# EAGLE board main (EAGLE 9.6.2)
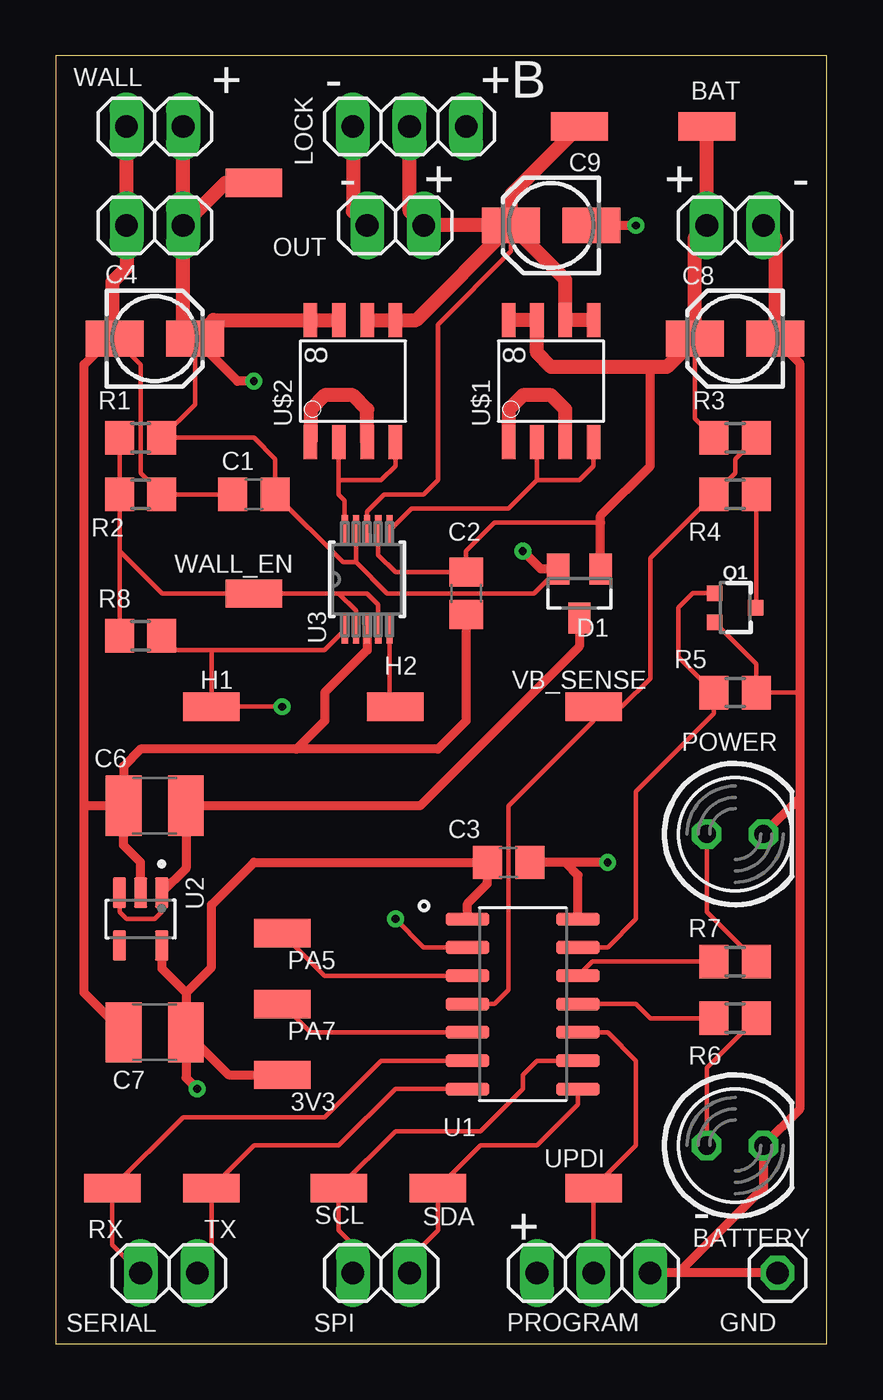
[diagram p0: board, top side]
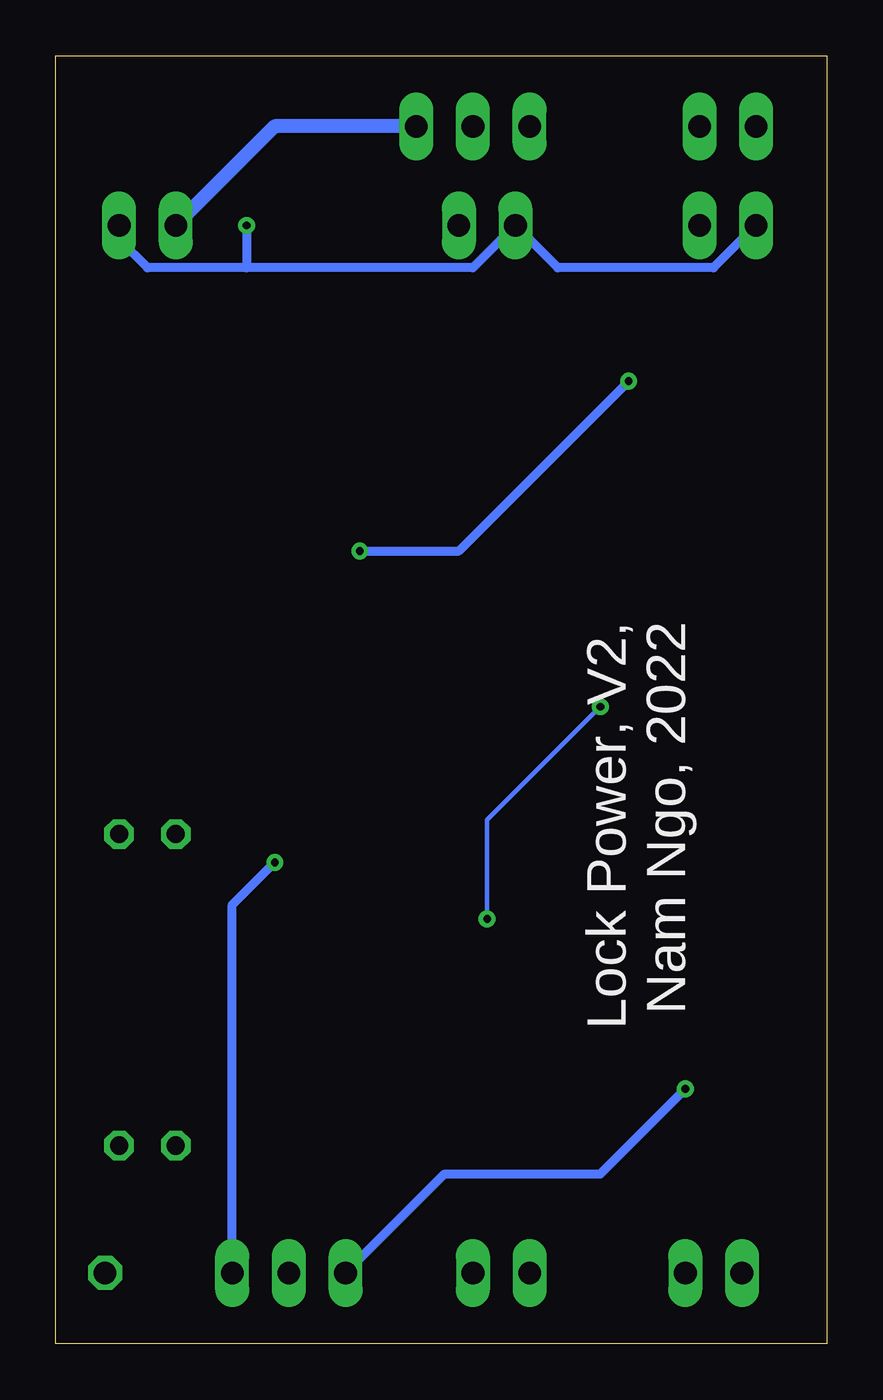
[diagram p1: board, bottom side, seen from below]

Size 34.59 x 57.77 mm. Coordinates in mm from the lower left corner, seen from the top.
Outline: 0,0 34.59,0 34.59,57.77 0,57.77 0,0
Copper layers (1*16): Top 0.035mm / dielectric 1.5mm / Bottom 0.035mm
Design rules "default": minimum track width 6mil, minimum drill 0.35mm, track to track 6mil, track to pad 6mil, pad to pad 6mil, via to via 6mil, smd to smd 6mil, copper to edge 40mil, drill to drill 6mil, minimum pad ring 10mil, minimum via ring 8mil, stop-mask expansion 4mil, vias tented up to drill 0mil, thermal gap 10mil

## Footprints (pad centres in the part's own frame; a part is rotated, then mirrored left to right if it is on the bottom)
SMD1,27-2,54 = smd 1.27 x 2.54: 1 0,0
1X02 = drill 1.016 long: 1 -1.27,0; 2 1.27,0
LED5MM = drill 0.813 octagon: A -1.27,0; K 1.27,0
C0805 = smd 1.3 x 1.5: 1 -0.95,0; 2 0.95,0
153CLV-0405 = smd 2.6 x 1.6: + 1.8,0; - -1.8,0
C1210 = smd 1.6 x 2.7: 1 -1.4,0; 2 1.4,0
SOT23 = smd 1 x 1.4: 1 -0.95,-1.1; 2 0.95,-1.1; 3 0,1.1
1X01 = drill 1.016 octagon: 1 0,0
1X03 = drill 1.016 long: 1 -2.54,0; 2 0,0; 3 2.54,0
SOT323 = smd 0.7 x 0.7: 1 -0.65,-0.925; 2 0.65,-0.925; 3 0,0.925
R0805 = smd 1.3 x 1.5: 1 -0.95,0; 2 0.95,0
SOIC127P600X175-14N = smd 1.95 x 0.59: 1 -2.48,3.81; 2 -2.48,2.54; 3 -2.48,1.27; 4 -2.48,0; 5 -2.48,-1.27; 6 -2.48,-2.54; 7 -2.48,-3.81; 8 2.48,-3.81; 9 2.48,-2.54; 10 2.48,-1.27; 11 2.48,0; 12 2.48,1.27; 13 2.48,2.54; 14 2.48,3.81
SOT95P285X140-5N = smd 1.35 x 0.6: 1 -1.185,0.95; 2 -1.185,0; 3 -1.185,-0.95; 4 1.185,-0.95; 5 1.185,0.95
MSOP-10_MS = smd 1.397 x 0.279: 1 -2.184,1.001; 2 -2.184,0.5; 3 -2.184,0; 4 -2.184,-0.5; 5 -2.184,-1.001; 6 2.184,-1.001; 7 2.184,-0.5; 8 2.184,0; 9 2.184,0.5; 10 2.184,1.001
SO-8 = smd 1.524 x 0.61: 1 -2.743,1.905; 2 -2.743,0.635; 3 -2.743,-0.635; 4 -2.743,-1.905; 5 2.743,-1.905; 6 2.743,-0.635; 7 2.743,0.635; 8 2.743,1.905

## Placement (x,y rotation side)
3V3  [SMD1,27-2,54]  10.16,12.06 90 top
BAT  [1X02]  30.48,50.16 0 top
BAT1  [SMD1,27-2,54]  29.21,54.61 90 top
BATTERY  [LED5MM]  30.48,8.89 0 top
C1  0.1uf  [C0805]  8.89,38.1 180 top
C2  0.1uf  [C0805]  18.41,33.66 90 top
C3  0.1uf  [C0805]  20.32,21.59 180 top
C4  22uf  [153CLV-0405]  4.45,45.09 0 top
C6  1uf  [C1210]  4.45,24.13 180 top
C7  1uf  [C1210]  4.45,13.97 180 top
C8  22uf  [153CLV-0405]  30.48,45.09 180 top
C9  10uf  [153CLV-0405]  22.23,50.16 180 top
D1  BAS70-05  [SOT23]  23.5,33.66 180 top
GND  [1X01]  32.38,3.17 0 top
H1  [SMD1,27-2,54]  6.99,28.57 270 top
H2  [SMD1,27-2,54]  15.24,28.57 270 top
LOCK  [1X03]  15.88,54.61 0 top
OUT  [1X02]  15.24,50.16 180 top
PA5  [SMD1,27-2,54]  10.16,18.41 90 top
PA7  [SMD1,27-2,54]  10.16,15.24 90 top
POWER  [LED5MM]  30.48,22.86 0 top
PROGRAM  [1X03]  24.13,3.17 0 top
Q1  310mA/60V/1.6Ω  [SOT323]  30.48,33.02 270 top
R1  200k  [R0805]  3.81,40.64 0 top
R2  45k  [R0805]  3.81,38.1 180 top
R3  200k  [R0805]  30.48,40.64 0 top
R4  100k  [R0805]  30.48,38.1 180 top
R5  100k  [R0805]  30.48,29.21 180 top
R6  65  [R0805]  30.48,14.61 180 top
R7  65  [R0805]  30.48,17.14 180 top
R8  1M  [R0805]  3.81,31.75 0 top
RX  [SMD1,27-2,54]  2.54,6.99 90 top
SCL  [SMD1,27-2,54]  12.7,6.99 90 top
SDA  [SMD1,27-2,54]  17.14,6.99 270 top
SERIAL  [1X02]  5.08,3.17 180 top
SPI  [1X02]  14.61,3.17 180 top
TX  [SMD1,27-2,54]  6.99,6.99 90 top
U1  ATTINY1614  [SOIC127P600X175-14N]  20.95,15.24 0 top
U2  RS3236-3.3  [SOT95P285X140-5N]  3.81,19.05 270 top
U3  LTC4416  [MSOP-10_MS]  13.97,34.29 90 top
U$1  IRF7314PBF  [SO-8]  22.23,43.18 90 top
U$2  IRF7314PBF  [SO-8]  13.34,43.18 90 top
UPDI  [SMD1,27-2,54]  24.13,6.99 90 top
V_OUT  [SMD1,27-2,54]  23.5,54.61 90 top
VB_SENSE  [SMD1,27-2,54]  24.13,28.57 270 top
WALL  [1X02]  4.45,50.16 180 top
WALL1  [SMD1,27-2,54]  8.89,52.07 90 top
WALL2  [1X02]  4.45,54.61 180 top
WALL_EN  [SMD1,27-2,54]  8.89,33.66 90 top

## Library data of the parts
3V3 BAT1 H1 H2 PA5 PA7 RX SCL SDA TX UPDI V_OUT VB_SENSE WALL1 WALL_EN = wirepad
BAT GND LOCK OUT PROGRAM SERIAL SPI WALL WALL2 = pinhead
BATTERY POWER = led
C1-C4 C6-C9 = rcl; SPICEPREFIX: C
D1 = BAS70-05; AVAILABILITY: In Stock; DESCRIPTION: Diode Array 1 Pair Common Cathode Schottky 70V 70mA (DC) Surface Mount TO-236-3, SC-59, SOT-23-3; MF: NXP Semiconductors; MP: BAS70-05; PACKAGE: SOT-23 ON; PRICE: None; PURCHASE-URL: https://pricing.snapeda.com/search/part/BAS70-05/?ref=eda
Q1 = SparkFun-DiscreteSemi; PROD_ID: TRANS-11151
R1-R8 = rcl; SPICEPREFIX: R
U1 = CustomParts; AVAILABILITY: In Stock; DESCRIPTION: AVR tinyAVR™ 1, Functional Safety (FuSa) Microcontroller IC 8-Bit 20MHz 16KB (16K x 8) FLASH 14-SOIC; MF: Microchip; MP: ATTINY1614-SSNR; PACKAGE: SO-14 Microchip; PRICE: None; PURCHASE-URL: https://pricing.snapeda.com/search/part/ATTINY1614-SSNR/?ref=eda
U2 = AP2112K-3.3TRG1; AVAILABILITY: In Stock; DESCRIPTION: Linear Voltage Regulator IC Positive Fixed 1 Output 600mA SOT-25; MF: Diodes Inc.; MP: AP2112K-3.3TRG1; PACKAGE: SOT-753 Diodes Inc.; PRICE: None; PURCHASE-URL: https://pricing.snapeda.com/search/part/AP2112K-3.3TRG1/?ref=eda
U3 = LTC4416IMS_PBF; AVAILABILITY: In Stock; DESCRIPTION: OR Controller Source Selector Switch P-Channel 2:2 10-MSOP; MF: Analog Devices; MP: LTC4416IMS#PBF; PACKAGE: MSOP-10 Linear Technology; PRICE: None; PURCHASE-URL: https://pricing.snapeda.com/search/part/LTC4416IMS#PBF/?ref=eda
U$1 U$2 = IRF7314PBF; AVAILABILITY: In Stock; DESCRIPTION: Mosfet Array 2 P-Channel (Dual) 20V 5.3A 2W Surface Mount 8-SO; MF: Infineon; MP: IRF7314PBF; PACKAGE: SOIC-8 International Rectifier; PRICE: None; PURCHASE-URL: https://pricing.snapeda.com/search/part/IRF7314PBF/?ref=eda

## Nets
+3.3V: 3V3.1 C3.2 C7.1 PROGRAM.1 U1.1 U2.5
+7V: C1.1 C4.+ D1.2 R1.2 U3.9 U$2.7 U$2.8 WALL1.1 WALL2.1 WALL.1
+UB: BAT1.1 BAT.1 C2.2 C8.+ D1.1 LOCK.3 R3.1 U3.7 U$1.7 U$1.8
BEFORE_V: C6.1 D1.3 U2.1 U2.3
G1: U3.10 U$2.2 U$2.4
G2: U3.6 U$1.2 U$1.4
GND: BAT.2 BATTERY.K C1.2 C2.1 C3.1 C4.- C6.2 C7.2 C8.- C9.- GND.1 LOCK.1 OUT.2 POWER.K PROGRAM.3 Q1.2 R2.1 R5.1 U1.14 U2.2 U3.3 WALL2.2 WALL.2
H1: H1.1 R8.2 U1.2 U3.1
LED1: R7.2 U1.12
LED2: R6.2 U1.11
N$1: R3.2 R4.2 U1.4 VB_SENSE.1
N$2: PA7.1 U1.5
N$3: U$1.1 U$1.3
N$4: U$2.1 U$2.3
N$5: POWER.A R7.1
N$6: H2.1 U3.5
N$7: Q1.3 R4.1
N$8: PA5.1 U1.3
N$11: BATTERY.A R6.1
PA3: Q1.1 R5.2 U1.13
RX: RX.1 SERIAL.2 U1.6
SCL: SCL.1 SPI.2 U1.9
SDA: SDA.1 SPI.1 U1.8
TX: SERIAL.1 TX.1 U1.7
UPDI: PROGRAM.2 U1.10 UPDI.1
VOUT: C9.+ LOCK.2 OUT.1 U3.8 U$1.5 U$1.6 U$2.5 U$2.6 V_OUT.1
WALL_EN: R1.1 R2.2 R8.1 U3.2 U3.4 WALL_EN.1

## Tracks (layer width: path | path; a pad name or v marks a point on that pad's centre or on a via)
+3.3V  (via drill 0.35)
  Top 0.406: U2.5 4.76,16.83 5.84,15.74 | 5.84,15.74 C7.1 | U1.1 18.48,19.75 19.37,20.64 C3.2 8.89,21.59 6.99,19.68 6.99,16.89 5.84,15.74 | C7.1 7.75,12.06 3V3.1 | C7.1 5.84,11.94 v6.35,11.43
  Bottom 0.406: v6.35,11.43 10.16,7.62 17.14,7.62 PROGRAM.1
+7V  (via drill 0.35)
  Top 0.203: C4.+ 6.25,42.12 R1.2 8.89,40.64 9.84,39.69 C1.1 12.88,35.06 13.47,35.06 | U3.9 13.47,35.06 | D1.2 21.45,33.66 14.87,33.66 13.47,35.06
  Top 0.406: D1.2 21.76,34.76 v20.95,35.56 | v8.89,43.18 8.15,43.18 C4.+
  Top 0.635: WALL.1 5.71,45.62 C4.+ 7.08,45.92 U$2.8 U$2.7 | WALL.1 7.62,52.07 WALL1.1 | WALL.1 WALL2.1
  Bottom 0.406: v20.95,35.56 16.51,35.56 v8.89,43.18
+UB
  Top 0.203: U3.7 14.47,35.38 15.24,34.6 C2.2 18.41,35.56 19.68,36.83 24.45,36.83 | R3.1 28.68,41.49 C8.+
  Top 0.406: D1.1 24.45,36.83 24.45,37.15 26.67,39.37 26.67,43.81
  Top 0.635: U$1.8 U$1.7 21.59,44.45 22.23,43.81 26.67,43.81 27.41,43.81 C8.+ 28.68,49.63 BAT.1 BAT1.1
  Bottom 0.635: LOCK.3 24.77,54.61 BAT.1
BEFORE_V
  Top 0.203: U2.1 4.76,19.36 4.45,19.05 3.17,19.05 2.86,19.36 U2.3
  Top 0.406: D1.3 23.5,31.29 16.34,24.13 C6.1 5.84,21.32 U2.1
G1
  Top 0.203: U3.10 12.97,37.83 12.7,38.1 12.7,38.73 | 12.7,38.73 U$2.2 | 12.7,38.73 14.61,38.73 15.24,39.37 U$2.4
G2
  Top 0.203: U3.6 15.96,37.47 20.32,37.47 21.59,38.73 | 21.59,38.73 U$1.2 | 21.59,38.73 23.5,38.73 24.13,39.37 U$1.4
GND  (via drill 0.35)
  Top 0.203: Q1.2 31.43,30.5 R5.1 33.38,29.21 | C1.2 R2.1 3.81,39.05 3.81,43.92 C4.-
  Top 0.406: U2.2 3.81,21.59 3.04,22.36 C6.2 | U3.3 13.97,31.11 12.06,29.21 12.06,27.94 10.79,26.67 | 10.79,26.67 3.81,26.67 3.04,25.91 C6.2 | C2.1 18.41,27.94 17.14,26.67 10.79,26.67 | C7.2 1.27,15.74 1.27,24.13 | 2.54,45.19 1.27,43.92 1.27,24.13 | C6.2 1.27,24.13 | U1.14 23.43,21.02 22.86,21.59 | 22.86,21.59 C3.1 | v24.77,21.59 22.86,21.59 | C9.- v26.04,50.16 | C8.- 33.38,43.99 33.38,29.21 33.38,24.49 | 33.38,24.49 POWER.K | 33.38,24.49 33.38,10.52 BATTERY.K 31.75,6.99 27.94,3.17 | 27.94,3.17 PROGRAM.3 | GND.1 27.94,3.17
  Top 0.635: BAT.2 32.28,49.63 C8.- | C4.- 2.54,45.19 2.54,47.62 3.17,48.26 WALL.2 WALL2.2 | LOCK.1 13.34,50.8 OUT.2
  Bottom 0.406: WALL.2 5.08,48.26 12.06,48.26 OUT.2 15.88,48.26 26.04,48.26 | BAT.2 31.75,49.53 30.48,48.26 26.04,48.26 | PROGRAM.3 26.67,19.68 v24.77,21.59 | v26.04,50.16 26.04,48.26
H1  (via drill 0.35)
  Top 0.203: U3.1 12.97,32.02 12.06,31.11 6.99,31.11 | R8.2 5.39,31.11 6.99,31.11 | 6.99,31.11 H1.1 v10.16,28.57 | v15.24,19.05 16.51,17.78 U1.2
  Bottom 0.203: v10.16,28.57 15.24,23.5 v15.24,19.05
LED1
  Top 0.203: R7.2 24.07,17.14 U1.12
LED2
  Top 0.203: U1.11 26.04,15.24 26.67,14.61 R6.2
N$1
  Top 0.203: U1.4 19.68,15.24 20.32,15.88 20.32,24.13 24.13,27.94 VB_SENSE.1 25.4,28.57 26.67,29.84 26.67,35.24 R4.2 30.48,39.05 30.48,39.69 R3.2
N$2
  Top 0.203: U1.5 11.43,13.97 PA7.1
N$3
  Top 0.635: U$1.3 22.86,41.91 22.23,42.55 20.95,42.55 20.32,41.91 U$1.1
N$4
  Top 0.635: U$2.3 13.97,41.91 13.34,42.55 12.06,42.55 11.43,41.91 U$2.1
N$5
  Top 0.203: R7.1 29.21,19.36 POWER.A
N$6
  Top 0.203: H2.1 14.97,28.84 U3.5
N$7
  Top 0.203: R4.1 31.43,33.05 Q1.3
N$8
  Top 0.203: U1.3 12.06,16.51 PA5.1
N$11
  Top 0.203: BATTERY.A 29.21,12.38 R6.1
PA3
  Top 0.203: Q1.1 28.59,33.67 27.94,33.02 27.94,30.8 R5.2 29.53,28.26 26.04,24.77 26.04,19.05 24.77,17.78 U1.13
RX
  Top 0.203: U1.6 14.61,12.7 12.06,10.16 5.71,10.16 RX.1 2.54,4.45 SERIAL.2
SCL
  Top 0.203: U1.9 21.59,12.7 20.95,12.06 20.95,11.43 19.05,9.53 15.24,9.53 SCL.1 12.7,5.08 13.34,4.45 SPI.2
SDA
  Top 0.203: U1.8 23.43,10.73 21.59,8.89 19.05,8.89 SDA.1 17.14,5.08 15.88,3.81 SPI.1
TX
  Top 0.203: U1.7 15.24,11.43 12.7,8.89 8.89,8.89 TX.1 6.99,3.81 SERIAL.1
UPDI
  Top 0.203: U1.10 24.77,13.97 26.04,12.7 26.04,8.89 UPDI.1 PROGRAM.2
VOUT
  Top 0.203: U3.8 13.97,37.34 14.73,38.1 16.51,38.1 17.14,38.73 17.14,45.72 20.43,49 C9.+
  Top 0.635: U$1.5 U$1.6 22.86,47.73 C9.+ | U$2.6 U$2.5 16.18,45.92 C9.+ | LOCK.2 15.88,50.8 OUT.1 C9.+ | C9.+ 20.43,51.54 V_OUT.1
WALL_EN
  Top 0.203: U3.2 13.47,32.88 12.7,33.66 | 12.7,33.66 13.97,33.66 14.47,33.16 U3.4 | 12.7,33.66 WALL_EN.1 4.76,33.66 2.86,35.56 | R1.1 R2.2 2.86,35.56 | R8.1 2.86,35.56

## Text on the board
tPlace: + | - | +B | - | + | + | - | - | +
bPlace: Lock Power, V2, / Nam Ngo, 2022